# EAGLE board LasCon_Wide (EAGLE 6.5.0)
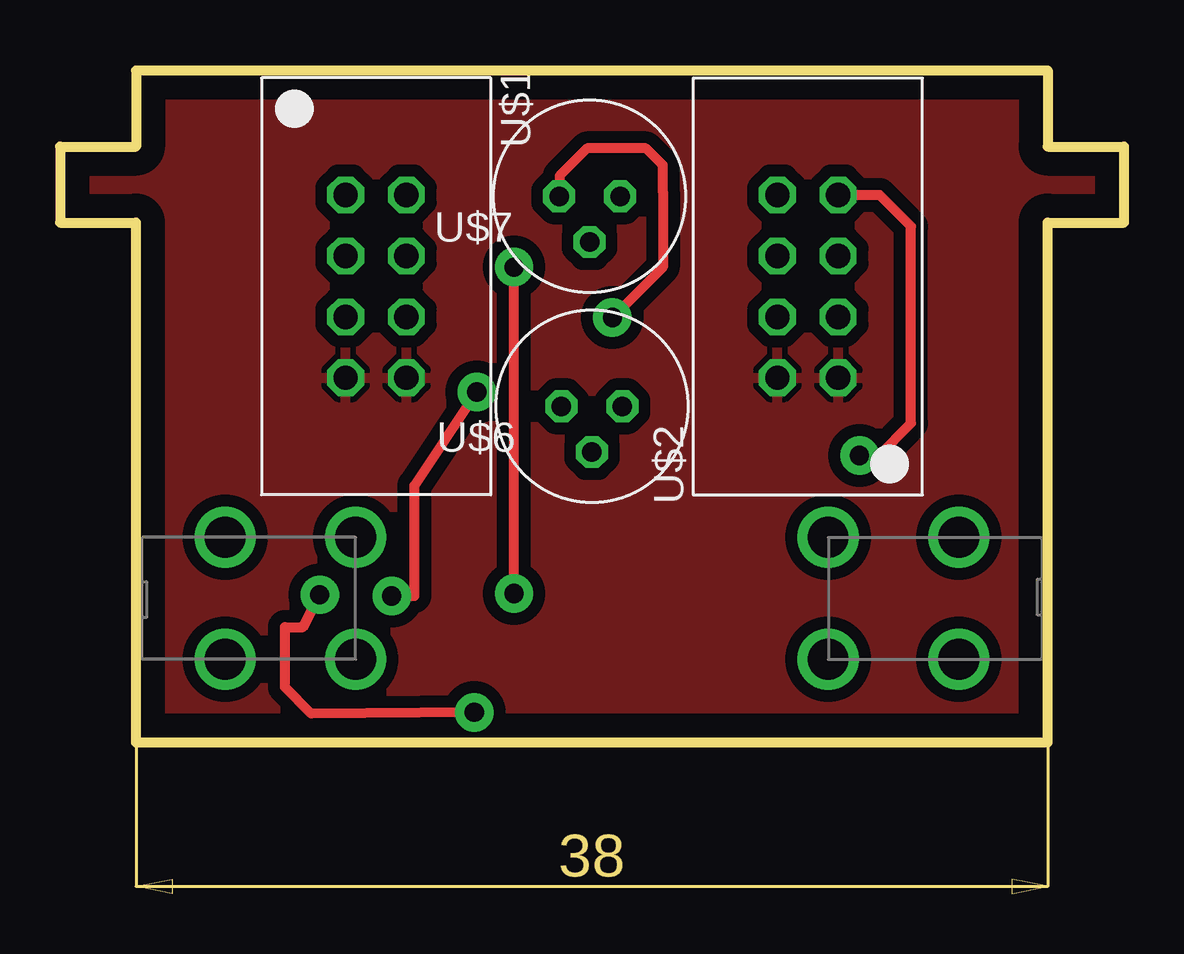
[diagram p0: board, top side]
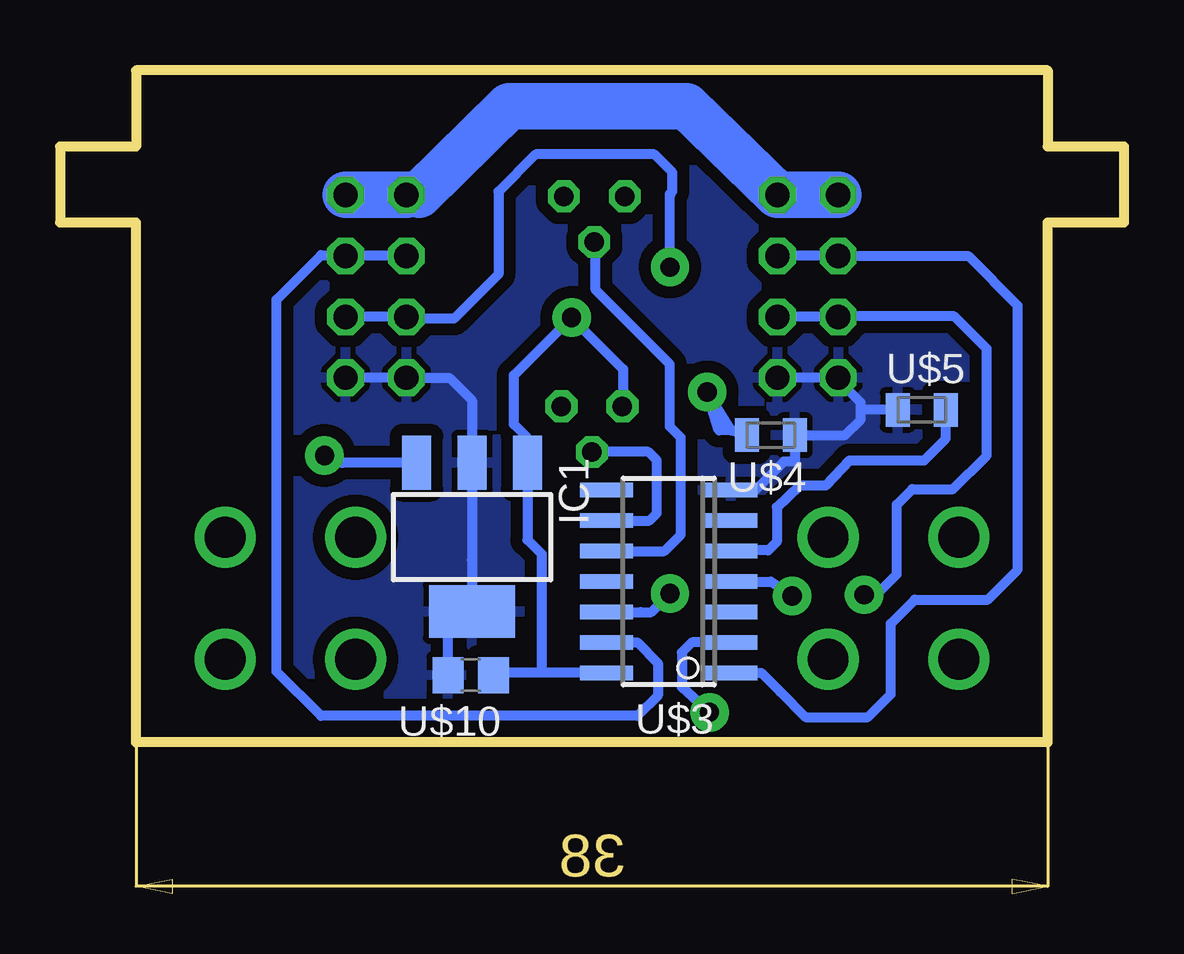
[diagram p1: board, bottom side, seen from below]

Size 44.35 x 28 mm. Coordinates in mm from the lower left corner, seen from the top.
Outline: 41.17,0 41.17,21.65 44.35,21.65 44.35,24.82 41.17,24.82 41.17,28 3.18,28 3.18,24.82 0,24.82 0,21.65 3.18,21.65 3.18,0 41.17,0
Copper layers (1*16): Top 0.0356mm / dielectric 1.5011mm / Bottom 0.0356mm
Design rules "SilverCircuits *": minimum track width 7mil, minimum drill 14mil, track to track 0.5mm, track to pad 0.5mm, pad to pad 0.5mm, via to via 0.5mm, smd to smd 0mil, copper to edge 1mm, drill to drill 8mil, minimum pad ring 10mil, minimum via ring 8mil, stop-mask expansion 4mil, vias tented up to drill 0mil, thermal gap 10mil

## Footprints (pad centres in the part's own frame; a part is rotated, then mirrored left to right if it is on the bottom)
SOT223 = smd 1.219 x 2.235: 1 -2.311,-3.099; 2 0,-3.099; 3 2.311,-3.099 | smd 3.6 x 2.2: 4 0,3.099
2X04 = drill 1.016 octagon: 1 -3.81,-1.27; 2 -3.81,1.27; 3 -1.27,-1.27; 4 -1.27,1.27; 5 1.27,-1.27; 6 1.27,1.27; 7 3.81,-1.27; 8 3.81,1.27
SO14 = smd 0.6 x 2.2: 1 -3.81,-2.6; 2 -2.54,-2.6; 3 -1.27,-2.6; 4 0,-2.6; 5 1.27,-2.6; 6 2.54,-2.6; 7 3.81,-2.6; 8 3.81,2.6; 9 2.54,2.6; 10 1.27,2.6; 11 0,2.6; 12 -1.27,2.6; 13 -2.54,2.6; 14 -3.81,2.6
RF-C0805 = smd 1 x 1.4: 1 -1,0; 2 1,0
LASER = drill 0.813 octagon: 1 1.27,0; 2 0,1.905; 3 -1.27,0
90DEGMNT = drill 1.7: P$1 -2.72,2.54; P$2 2.72,2.54; P$3 -2.72,-2.54; P$4 2.72,-2.54
C0805 = smd 1.3 x 1.5: 1 -0.95,0; 2 0.95,0

## Placement (x,y rotation side)
IC1  [SOT223]  27.18,8.55 180 bottom
U$1  2X4IDC  [2X04]  13.18,19 270 top
U$2  2X4IDC  [2X04]  31.18,19 90 top
U$3  WS2801  [SO14]  18.98,6.7 90 bottom
U$4  24  [RF-C0805]  14.73,12.8 180 bottom
U$5  24  [RF-C0805]  8.43,13.85 0 bottom
U$6  LASER  [LASER]  22.18,14 180 top
U$7  LASER  [LASER]  22.07,22.75 180 top
U$8  90DEGMNT  [90DEGMNT]  9.61,6 0 top
U$9  90DEGMNT  [90DEGMNT]  34.75,6 180 top
U$10  [C0805]  27.23,2.8 180 bottom

## Library data of the parts
IC1 = microchip; MPN: MCP1804T-3302I
U$1 U$2 = GW-devices; MPN: 75869-132LF
U$3-U$10 = GW-devices

## Nets
+3V3: IC1.1 U$3.14 U$6.1 U$7.1 U$10.1
GND: IC1.2 IC1.4 U$1.7 U$1.8 U$2.1 U$2.2 U$3.7 U$4.1 U$5.1 U$10.2
N$1: IC1.3 U$1.1 U$1.2 U$2.7 U$2.8
N$2: U$3.9 U$6.2
N$3: U$3.10 U$7.2
N$5: U$1.3 U$1.4 U$3.1
N$6: U$1.5 U$1.6 U$3.2
N$7: U$2.5 U$2.6 U$3.13
N$8: U$2.3 U$2.4 U$3.12
N$9: U$3.4 U$4.2
N$10: U$3.5 U$5.2

## Tracks (layer width: path | path; a pad name or v marks a point on that pad's centre or on a via)
+3V3  (via drill 0.8)
  Top 0.406: v23.03,17.7 25.12,19.8 25.12,22.95 25.12,23.05 25.12,24.05 24.43,24.75 21.98,24.75 20.82,23.6 20.82,22.77 U$7.1
  Bottom 0.406: U$6.1 20.88,14.03 20.88,15.55 v23.03,17.7 25.43,15.3 25.43,13.25 24.86,12.69 IC1.1 24.86,8.44 24.28,7.85 24.28,2.9 | U$3.14 24.28,2.9 | 24.28,2.9 25.57,2.9 25.78,2.9 25.88,2.8 U$10.1
GND
  Bottom 0.406: U$1.8 U$1.7 11.91,15.08 10.98,14.15 10.98,13.75 | U$3.7 15.37,10.51 14.18,11.7 13.73,11.7 13.73,11.85 13.73,12.3 U$4.1 11.62,12.8 10.98,13.45 10.98,13.75 | U$5.1 10.88,13.85 10.98,13.75 | U$10.2 28.18,4.45 IC1.4 | 26.98,5.65 IC1.4 | 32.42,15.17 U$2.1 U$2.2 28.12,15.19 27.18,14.25 27.18,11.15 | IC1.2 27.18,11.15 | 27.18,11.15 27.18,7.6 27.18,5.95 | 27.18,5.95 IC1.4 | 27.43,6.2 27.18,5.95
  pour Top: 3.23,28 41.17,28 41.17,24.8 44.42,24.8 44.42,21.6 41.23,21.6 41.23,0 3.12,0 3.12,21.7 0.03,21.7 0.03,24.8 3.18,24.8 3.18,28
  pour Bottom: 3.28,28 41.17,28 41.17,24.85 44.33,24.85 44.33,21.65 41.17,21.65 41.17,0 3.18,0 3.18,21.65 0.03,21.65 0.03,24.85 3.18,24.85 3.18,28
N$1  (via drill 0.8)
  Top 0.406: v33.33,11.95 34.12,11.95 35.48,13.3 35.48,21.5 34.17,22.8 U$2.7
  Bottom 0.406: U$1.2 14.69,22.81 | U$2.8 29.38,22.81 | 29.43,10.99 IC1.3 32.57,11.65 32.88,11.95 v33.33,11.95
  Bottom 1.93: U$1.1 U$1.2 18.23,26.5 18.48,26.5 25.37,26.5 25.64,26.5 29.38,22.81 | U$2.8 U$2.7
N$2
  Bottom 0.406: U$3.9 19.79,9.24 19.48,9.55 19.48,11.75 19.82,12.1 U$6.2
N$3
  Bottom 0.406: U$7.2 22.03,21.05 22.03,18.85 20.07,16.9 19.57,16.4 18.93,15.75 18.93,13.15 18.48,12.7 18.48,8.65 19.16,7.97 U$3.10
N$5
  Bottom 0.406: U$1.4 U$1.3 11.89,20.25 6.48,20.25 4.43,18.2 4.43,7.2 5.68,5.95 8.73,5.95 9.73,4.95 9.73,2 10.68,1.05 13.28,1.05 14.33,2.1 15.12,2.89 U$3.1 16.41,2.85
N$6  (via drill 0.8)
  Top 0.406: v17.27,1.25 10.48,1.2 9.38,2.3 9.38,4.8 10.12,4.8 v10.83,6.15
  Bottom 0.406: U$1.6 U$1.5 11.89,17.75 7.08,17.75 5.73,16.4 5.73,11.95 7.12,10.55 8.83,10.55 9.48,9.9 9.48,9.4 9.48,7 10.53,5.95 10.78,6.15 v10.83,6.15 | U$3.2 18.02,4.16 18.43,3.75 18.43,2.3 v17.27,1.25
N$7
  Bottom 0.406: U$2.6 U$2.5 32.48,20.3 33.48,20.3 35.33,18.45 35.33,2.95 33.48,1.1 20.28,1.1 19.43,1.95 19.43,3.3 20.29,4.16 U$3.13
N$8  (via drill 0.8)
  Top 0.406: v18.93,6.2 v18.93,19.8
  Bottom 0.406: U$2.3 U$2.4 29.83,17.65 27.93,17.65 26.62,18.95 26.07,19.5 26.07,22.95 24.53,24.5 19.57,24.5 18.82,23.75 18.82,23.7 18.82,22.95 18.93,22.85 v18.93,19.8 | U$3.12 20.14,5.43 19.7,5.43 v18.93,6.2
N$9  (via drill 0.8)
  Top 0.406: v13.83,6.1 14.78,6.1 14.78,7.65 14.78,7.85 14.78,10.7 v17.38,14.6
  Bottom 0.406: U$4.2 16.38,13 | 16.38,13 16.88,13 v17.38,14.6 16.38,13 | 17.08,6.7 U$3.4 14.73,6.7 v13.83,6.1
N$10
  Bottom 0.406: U$3.5 16.34,8 14.83,8 14.48,8.35 14.48,9.8 13.53,10.7 12.43,10.7 11.43,11.75 8.33,11.75 7.43,12.65 U$5.2